# Altium PCB PD_Controller_Wall_Following_Robo_1.PcbDoc
Units mm, origin at the board's own origin, x right, y up, seen from the top; angles counter-clockwise.
Board outline 59.69 x 64.13 mm, 2 copper layers (Top Layer, Bottom Layer); 19 components, 16 nets, 58 pads, 4 vias.
Unrouted connection lines stored in the file: 1.
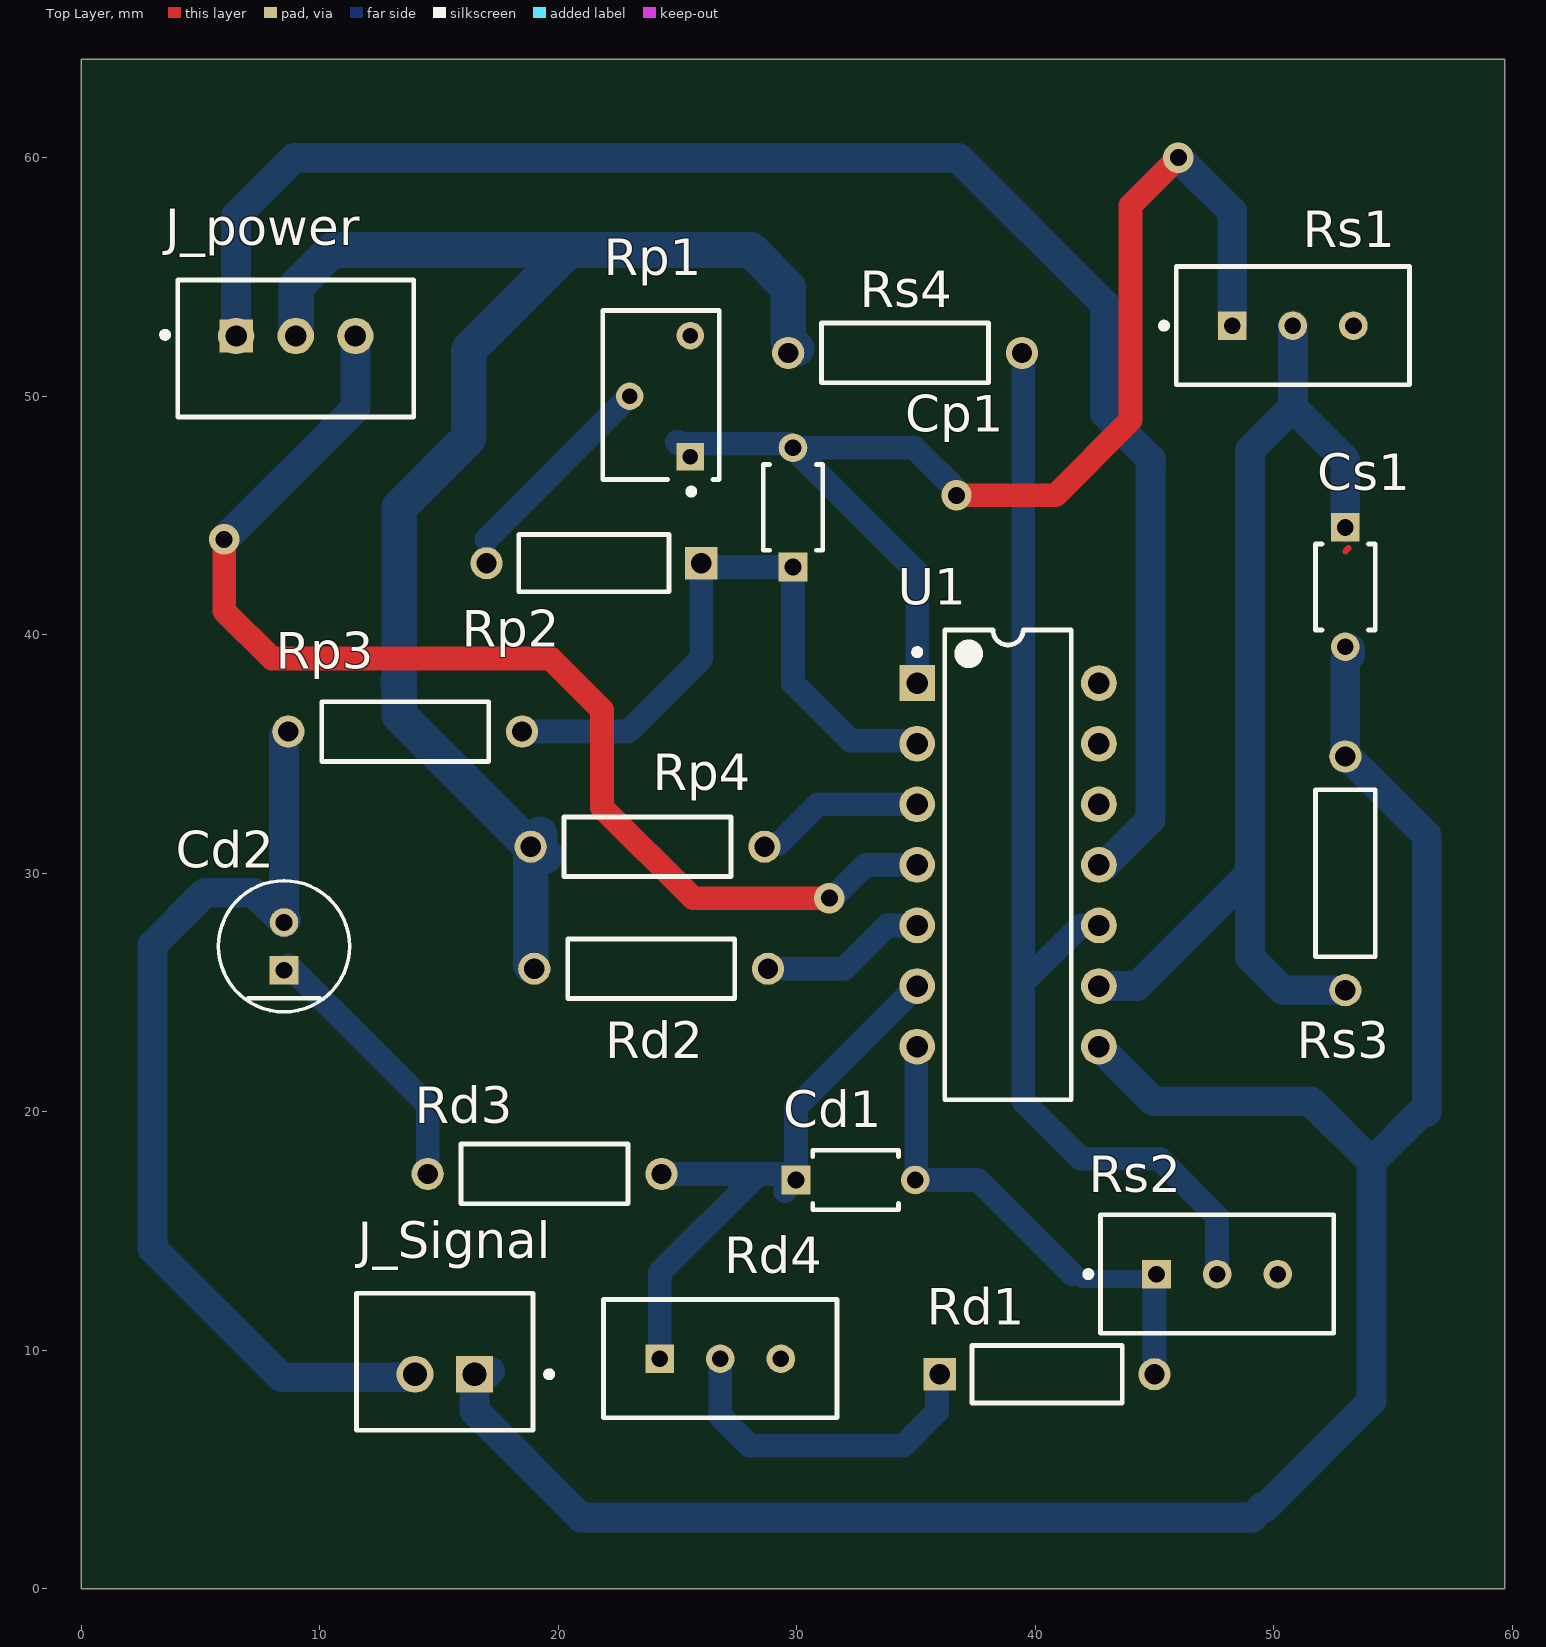
[diagram p0: Top Layer view]
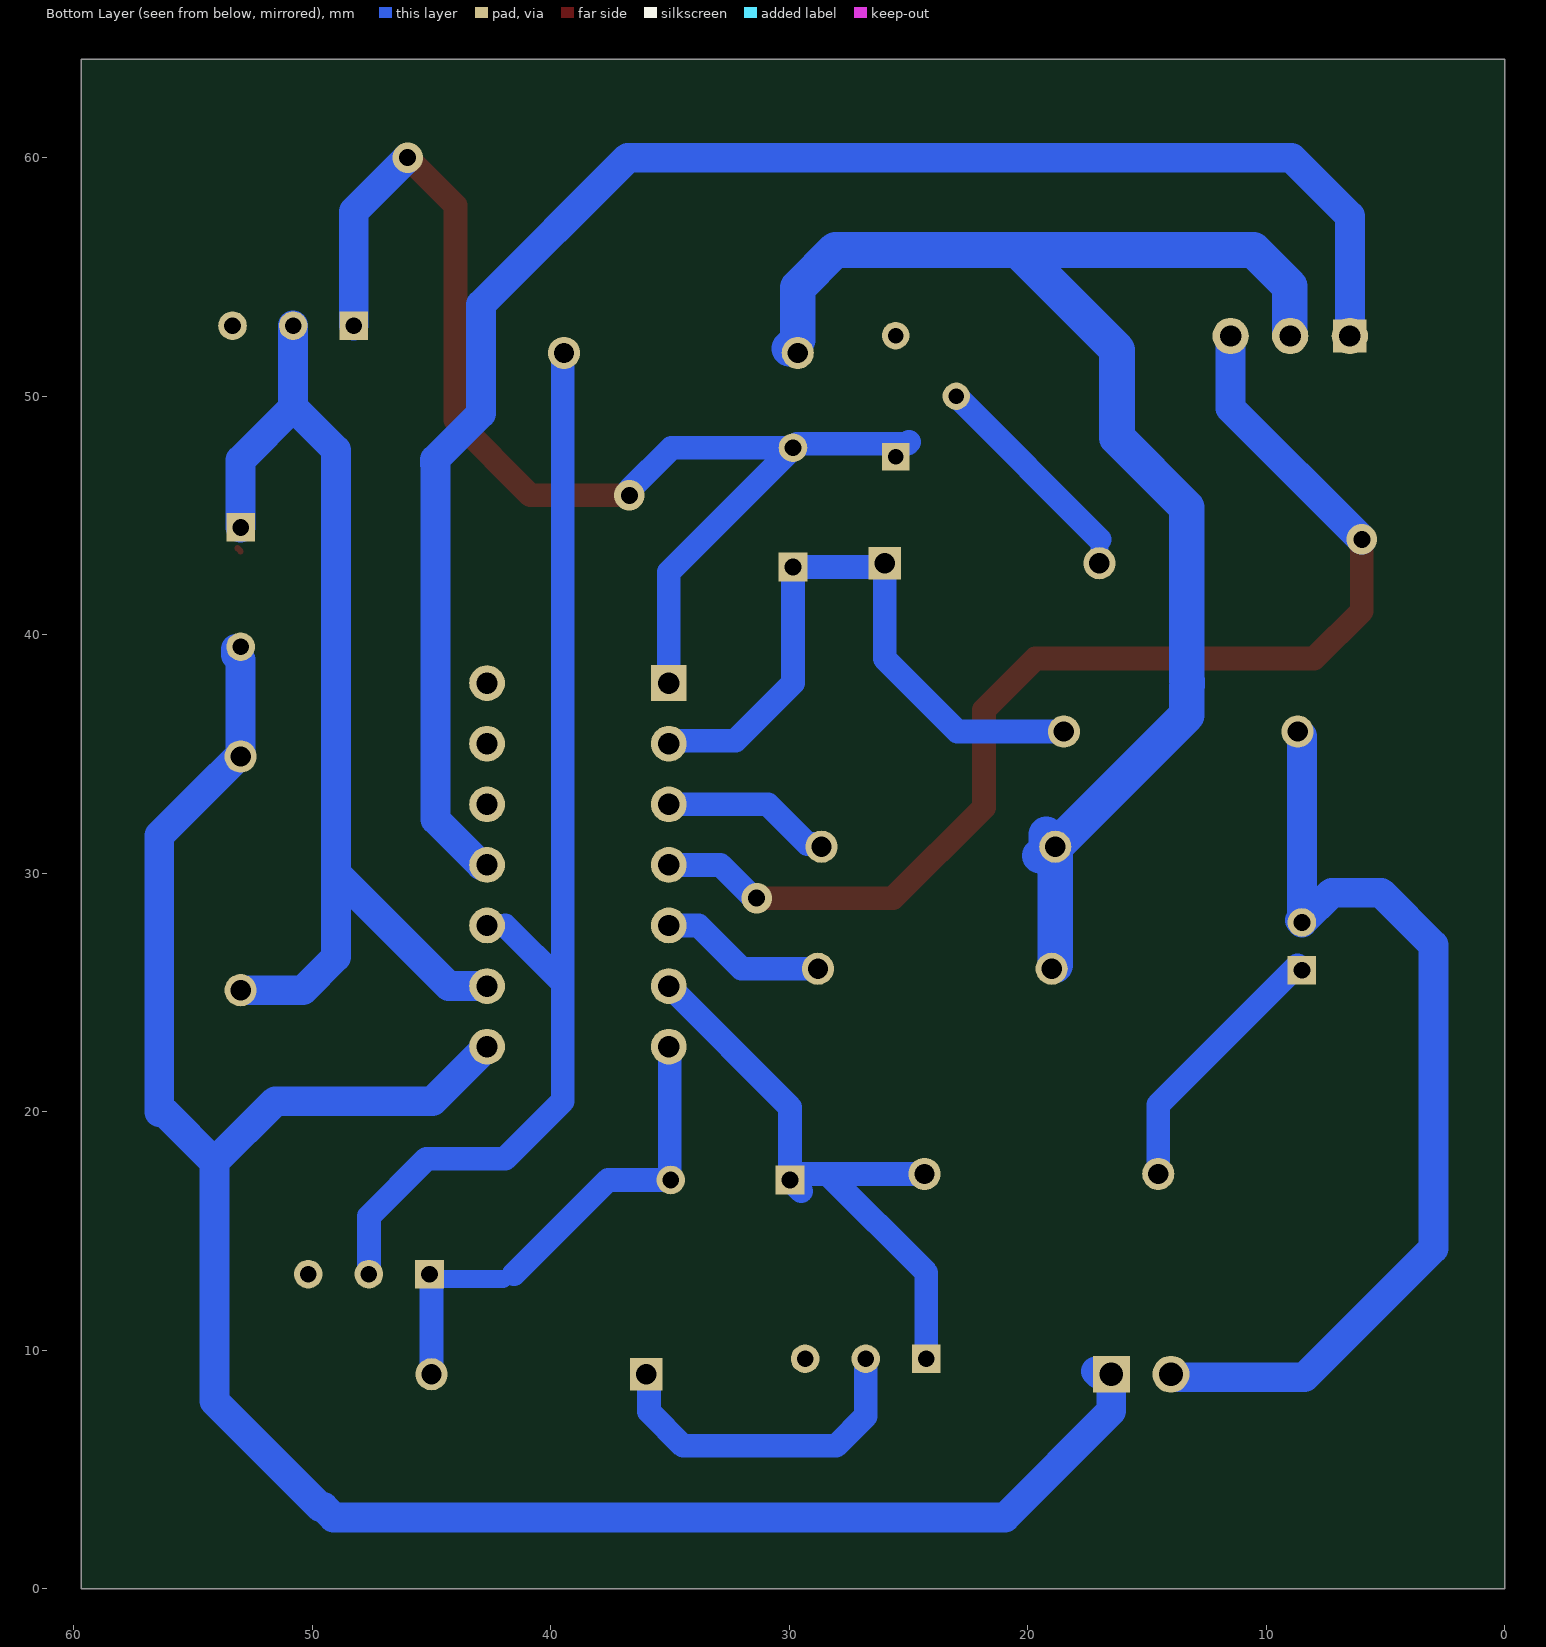
[diagram p1: Bottom Layer view, seen from below]
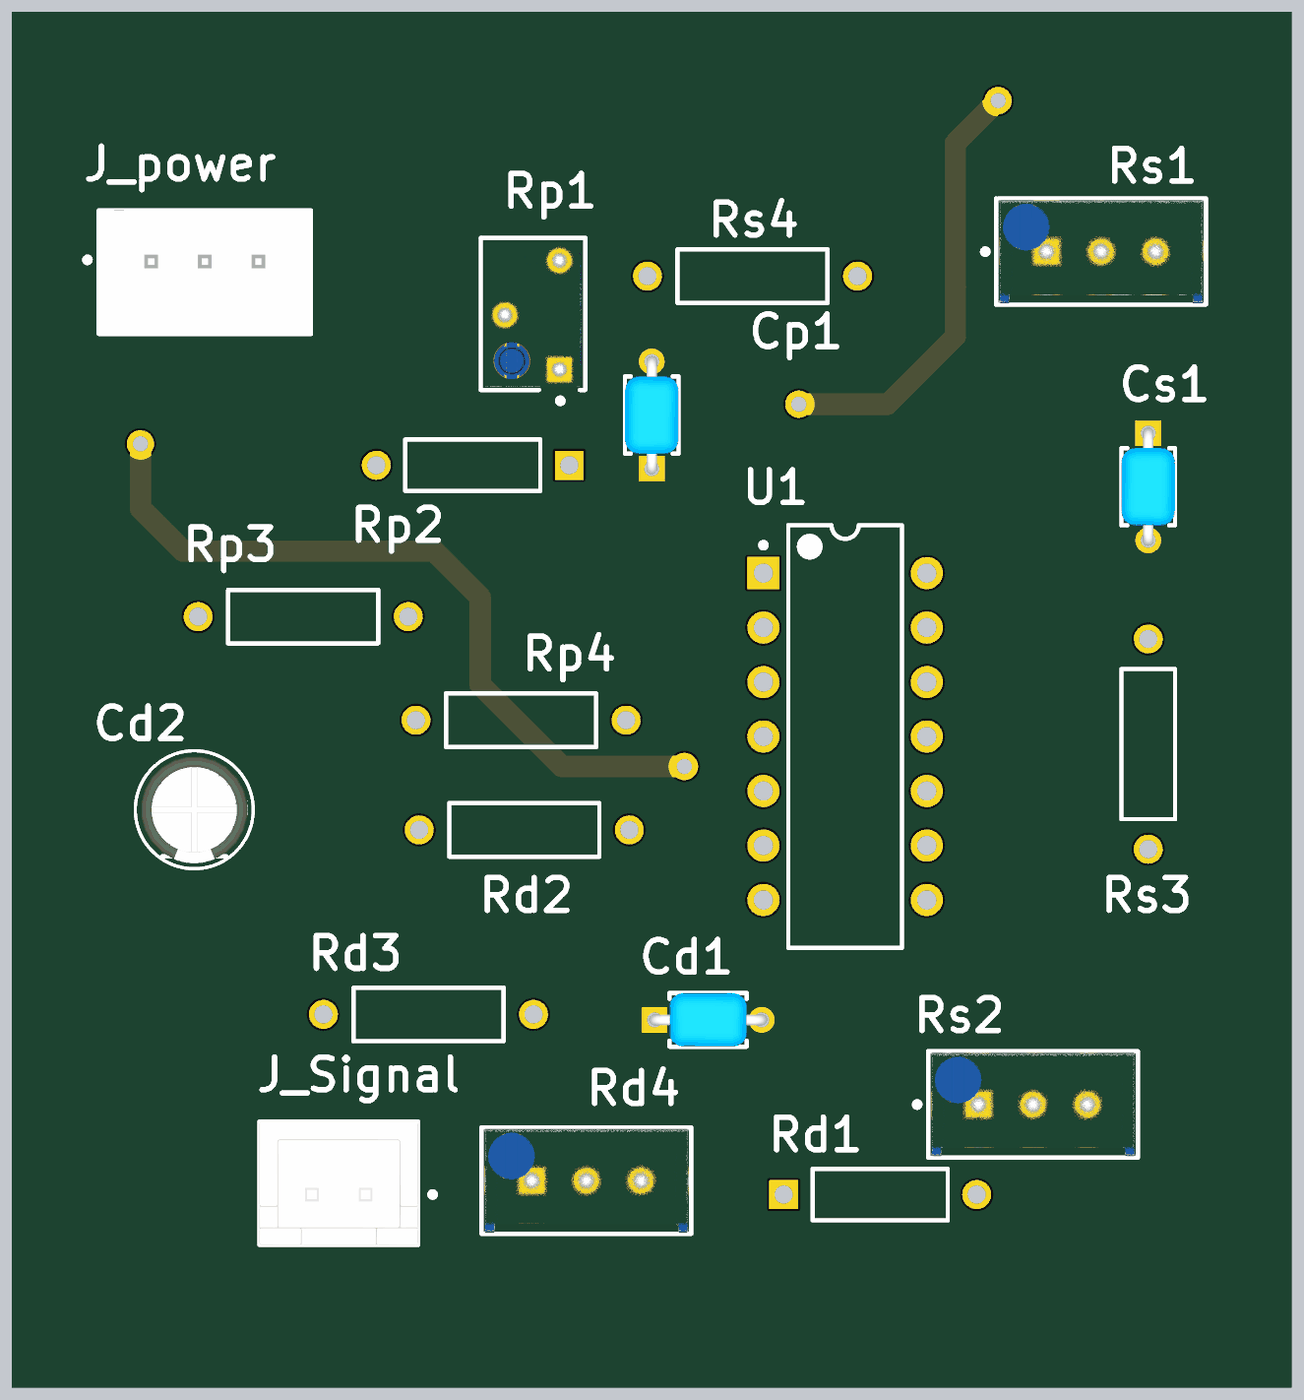
[diagram p2: 3D render of the assembled board from above, using the file's embedded part models]

## Layer stack, top to bottom
Top Solder: solder mask 0.0102, Solder Resist, Dk 3.5
Top Layer: signal copper 0.0356
Dielectric 1: dielectric 0.32, FR-4, Dk 4.8
Bottom Layer: signal copper 0.0356
Bottom Solder: solder mask 0.0102, Solder Resist, Dk 3.5

## Board outline
0,0 59.69,0 59.69,64.135 0,64.135

## Design rules (kind name [scope] priority, off if disabled: settings)
Clearance [All] p1: gap=0.254 ignorepadtopadclearanceinfootprint=FALSE except(0: Arc-Hole Track-Hole SMDPad-Hole THPad-Hole Via-Hole Fill-Hole Poly-Hole Region-Hole Text-Hole)
PolygonConnect [All] p1: connectstyle=Relief reliefconductorwidth=0.254 reliefentries=4 polygonreliefangle="90 Angle" airgapwidth=0.254
RoomDefinition Sheet1 [InComponentClass('Sheet1')] p1: confinementstyle=ConfineOut formatcopy=TRUE lockcomponents=FALSE outline 114.681,-17.526 247.777,-17.526 247.777,5.588 114.681,5.588
RoutingVias [All] p1: holewidth=0.711 width=1.27 viastyle="Through Hole" minholewidth=0.711 minwidth=1.27 maxholewidth=0.711 maxwidth=1.27
SolderMaskExpansion [All] p1: expansion=0.102 istentingtop=FALSE
Width [All] p1: maxlimit=1.5 minlimit=0.5 preferedwidth=0.75 minimp=50.000000 maximp=50.000000 favimp=50.000000
30 further rules are at their usual default settings.

## Classes and differential pairs
component class Sheet1: Cd1 Cd2 Cp1 J_power J_Signal Rd1 Rd2 Rd3 Rd4 Rp1 Rp2 Rp3 Rp4 Rs1 Rs2 Rs3 Rs4

## Components (designator, comment, footprint, x,y, rotation, side; value= is the part's Value field where it differs from the comment)
Cd1 "27pF" FP-RCE0K1-MFG 32.472,17.145 r0 top
Cd2 "2.2uF" FP-RAD-TH-D_5_0_5-L_11_1-MFG 8.509,26.94 r90 top
Cp1 "" FP-RCE0K1-MFG 29.845,45.339 r90 top
Cs1 "27pF" FP-RCE0K1-MFG 53,42 r270 top
J_power "Power" FP-B3B-XH-A_LF_SN-MFG 9,52 r0 top
J_Signal "Signal" FP-B2B-XH-A_LF_SN-MFG 15.25,9.525 r180 top
Rd1 "100" RESA60-630X240 40.5,9 r0 top
Rd2 "10K" OMTE-RES7X2.5-2 23.9,26 r0 top
Rd3 "10K" OMTE-RES7X2.5-2 19.431,17.399 r0 top
Rd4 "10K" FP-3296W-MFG 26.797,9.652 r270 top
Rp1 "10K" FP-3266W-MFG 24.31,50.055 r90 top value=10kΩ
Rp2 "100" RESA60-630X240 21.5,43 r180 top
Rp3 "10K" OMTE-RES7X2.5-2 13.589,35.941 r0 top
Rp4 "10K" OMTE-RES7X2.5-2 23.749,31.115 r0 top
Rs1 "10K" FP-3296W-MFG 50.8,52.964 r270 top
Rs2 "10K" FP-3296W-MFG 47.625,13.203 r270 top
Rs3 "10K" OMTE-RES7X2.5-2 53,30 r90 top
Rs4 "10K" OMTE-RES7X2.5-2 34.544,51.816 r0 top
U1 "LM324N" N0014A 38.862,30.353 r0 top

## Footprints (in the part's own frame and the unit in brackets; to place one, negate y for a bottom-side part, rotate by r counter-clockwise, add the part's x,y. Pads: shape width x height; smd on the part's side, far side on the other; paste and mask are expansions set on the pad)
FP-3266W-MFG [mm]
  rect 1.15x1.15 hole 0.65 paste-1000 mask+0: 1(-2.595,-1.23)
  round 1.15 hole 0.65 paste-1000 mask+0: 2(-0.055,1.31) 3(2.485,-1.23)
  silkscreen extent -4.17,-2.44 3.54,2.44, body extent -3.64,-2.54 3.64,2.54, height 0.25
FP-3296W-MFG [mm]
  rect 1.2x1.2 hole 0.7 paste-1000 mask+0: 1(0.005,-2.54)
  round 1.2 hole 0.7 paste-1000 mask+0: 2(0.005,0) 3(0.005,2.54)
  silkscreen extent -2.48,-4.89 2.48,4.89, body extent -2.58,-4.99 2.58,4.99, height 0.25
FP-B2B-XH-A_LF_SN-MFG [mm]
  rect 1.55x1.55 hole 1 paste-1000 mask+0: 1(-1.25,0.525)
  round 1.55 hole 1 paste-1000 mask+0: 2(1.25,0.525)
  silkscreen extent -4.5,-2.88 3.7,2.88, body extent -3.8,-2.98 3.8,2.98, height 0.25
FP-B3B-XH-A_LF_SN-MFG [mm]
  rect 1.4x1.4 hole 0.9 paste-1000 mask+0: 1(-2.5,0.525)
  round 1.4 hole 0.9 paste-1000 mask+0: 2(0,0.525) 3(2.5,0.525)
  silkscreen extent -5.6,-2.88 4.95,2.88, body extent -5.05,-2.98 5.05,2.98, height 0.25
FP-RAD-TH-D_5_0_5-L_11_1-MFG [mm]
  rect 1.2x1.2 hole 0.7 paste-1000 mask+0: 1(-1,0)
  round 1.2 hole 0.7 paste-1000 mask+0: 2(1,0)
  silkscreen extent -2.75,-2.75 2.75,2.75, body extent -2.85,-2.85 2.85,2.85, height 0.25
FP-RCE0K1-MFG [mm]
  rect 1.2x1.2 hole 0.7 paste-1000 mask+0: 1(-2.5,0)
  round 1.2 hole 0.7 paste-1000 mask+0: 2(2.5,0)
  silkscreen extent -1.8,-1.25 1.8,1.25, body extent -3.2,-1.35 3.2,1.35, height 0.25
N0014A [mm] "DIP, 14-Leads, Body 19.7x6.6mm, Pitch 2.54mm"
  rect 1.5x1.5 hole 0.9: 1(-3.81,7.62)
  round 1.5 hole 0.9: 2(-3.81,5.08) 3(-3.81,2.54) 4(-3.81,0) 5(-3.81,-2.54) 6(-3.81,-5.08) 7(-3.81,-7.62) 8(3.81,-7.62) 9(3.81,-5.08) 10(3.81,-2.54) 11(3.81,0) 12(3.81,2.54) 13(3.81,5.08) 14(3.81,7.62)
  silkscreen extent -3.93,-9.85 2.65,9.85, body extent -3.95,-9.85 3.95,9.85, height 5.08
OMTE-RES7X2.5-2 [mm] "Resistor, Axial; Body 7x2.5mm, Lead Dia. 0.6mm"
  round 1.35 hole 0.85: 1(-4.9,0) 2(4.9,0)
  silkscreen extent -3.5,-1.25 3.5,1.25, body extent -3.5,-1.25 3.5,1.25, height 2.5
RESA60-630X240 [mm] "Axial Resistor, 2-Leads, Dia 2.4mm, Body Length 6.3mm"
  rect 1.35x1.35 hole 0.85: 1(-4.5,0)
  round 1.35 hole 0.85: 2(4.5,0)
  silkscreen extent -3.15,-1.2 3.15,1.2, body extent -3.15,-1.2 3.15,1.2, height 2.4

## Part data
Cd1 Cs1: library part CMP-06035-026251-1, "Cap Ceramic 27pF 50V C0G ±5% Radial 5mm +125°C Automotive Bulk", Case/Package=Radial, Dielectric=C0G, Max Operating Temperature=125°C, Min Operating Temperature=-55°C, Package Quantity=1, Ratings=AEC-Q200, Resistor Type=Ceramic, Tolerance=5%, Voltage Rating=50V, Capacitance=27pF, Height=3.5mm, Height - Seated (Max)=0.138inch, Lead Diameter=0.5mm, Lead Pitch=0.197inch, Lead/Base Style="Formed Leads", Length=0.142inch, Mount="Through Hole", Packaging="Tape and Reel", Termination=Radial, Voltage Rating (DC)=50V, Width=0.098inch
Cd2: library part CMP-05427-000832-1, "Aluminum Electrolytic Capacitors (Radial Lead Type) AEC-Q200 Qualified 2.2uF ±20% 50V", Case/Package=Radial, Max Operating Temperature=105°C, Min Operating Temperature=-55°C, Package Quantity=2000, Ripple Current=18mA, Tolerance=20%, Voltage Rating=50V, Capacitance=2.2uF, Diameter=5mm, Height=11mm, Height - Seated (Max)=0.472inch, Lead Diameter=0.5mm, Lead Pitch=5mm, Lead/Base Style=Straight, Length=11mm, Life (Hours)=1000Hour, Mount="Through Hole", Packaging="Tape and Reel", Radiation Hardening=No, RoHS Compliant=Yes, Series=NHG, Termination=Radial, Voltage Rating (DC)=50V
Cp1: library part CMP-06035-026251-1, "Cap Ceramic 27pF 50V C0G ±5% Radial 5mm +125°C Automotive Bulk", Capacitance=27pF, Case/Package=Radial, Dielectric=C0G, Max Operating Temperature=125°C, Min Operating Temperature=-55°C, Package Quantity=1, Ratings=AEC-Q200, Resistor Type=Ceramic, Tolerance=5%, Voltage Rating=50V, Height=3.5mm, Height - Seated (Max)=0.138inch, Lead Diameter=0.5mm, Lead Pitch=0.197inch, Lead/Base Style="Formed Leads", Length=0.142inch, Mount="Through Hole", Packaging="Tape and Reel", Termination=Radial, Voltage Rating (DC)=50V, Width=0.098inch
J_power: library part CMP-17439-000014-3, "CONN HEADER VERT 3POS 2.5MM", Color=Natural, Contact Resistance=20mR, Current Rating=3A, Flammability Rating="UL94 V-0", Housing Color=White, Insulation Resistance=1GR, Max Operating Temperature=85°C, Max Voltage Rating (AC)=250V, Min Operating Temperature=-25°C, Connector Type=Header, Contact Finish - Mating=TIN, Contact Material=Brass, Contact Plating=Tin, Contact Shape=Square, Contact Type="Male Pin", Depth=5.75mm, Fastening Type=Detent, Gender=Male, Housing Material=Polyamide, Insulation Color=Natural, Insulation Material=Nylon, Lead Free="Lead Free", Lead Pitch=2.5mm, Length=9.9mm, Max Current Rating=3A, Max Voltage Rating (DC)=250V, Mount="Through Hole", Number Of Contacts=3, Number of Positions=3, Number Of Rows=1, Orientation=Straight, Packaging=Bulk, Pitch=2.5mm, REACH SVHC="No SVHC", Series=XH, Termination=Solder, Voltage Rating=250V, Voltage Rating (AC)=250V, Wire/Cable Gauge=22AWG
J_Signal: library part CMP-2000-05888-3, "CONN HEADER VERT 2POS 2.5MM", Color=Natural, Contact Resistance=20mR, Current Rating=3A, Housing Color=White, Insulation Resistance=1GR, Max Operating Temperature=85°C, Max Voltage Rating (AC)=250V, Min Operating Temperature=-25°C, Connector Type="Male Pin", Contact Material=Brass, Contact Plating=Tin, Contact Type="Male Pin", Depth=5.75mm, Fastening Type=Detent, Housing Material=Polyamide, Lead Free="Lead Free", Lead Pitch=2.5mm, Length=7.4mm, Max Current Rating=3A, Max Voltage Rating (DC)=250V, Mount="Through Hole", Number Of Contacts=2, Number of Positions=2, Number Of Rows=1, Orientation=Straight, Packaging=Bulk, Pitch=2.5mm, REACH SVHC="No SVHC", Series=XH, Termination=Solder, Voltage Rating=250V, Voltage Rating (AC)=250V, Wire/Cable Gauge=22AWG
Rd1 Rp2: library part CMP-1659-00071-1, "Axial Resistor, 100 Ohm, +/- 1%, 0.25 W, -55 to 155 degC, 2-Pin THD, RoHS, Bulk", Case\Package=Axial, Max Operating Temperature="155 degC", Min Operating Temperature="-55 degC", Package Quantity=200, Power Rating="250 mW", Resistance="4.75 kohm", Tolerance=1%, Type (Resistor)="Metal Film", Voltage Rating="250 V", ComponentLink1Description="Manufacturer URL", ComponentLink1URL=http://www.yageo.com/, ComponentLink2Description=Datasheet, ComponentLink2URL=http://www.yageo.com/documents/recent/Yageo%20LR_MFR_2013.pdf, DatasheetVersion=Apr-13, Length="0.248 inch", Mount="Through Hole", PackageDescription="2-Pin Axial Lead, Dia 2.4 mm, Body Length 6.3 mm", PackageReference=MFR-25, Packaging=Bulk, RoHSCompliant=true
Rd2 Rd3 Rp3 Rp4 Rs3 Rs4: library part CMP-2000-06865-1, "Little Demon(R) Carbon Composition Molded OD Series, 250 V, 10 KOhm, +/-5%, -70 to 130 degC, 2-Pin THD, RoHS, Bulk", Manufacturer=Ohmite, Operating Temperature=-, Package / Case=Axial, Package Description="2-Pin THD Resistor, Body 7 x 2.5 mm, Lead Dia. 0.6 mm", Package Reference=RES7X2.5, PartNumber=OD103JE, Power (Watts)=0.25W,1/4W, Power Rating=0.25W, Resistance (Ohms)=10k, Standard Package=100, Tolerance=±5%, Catalog Drawings=OD,OF,OASeries, Category=Resistors, Composition=CarbonComposition, Datasheet URL=http://www.ohmite.com/cat/res_od_of_oa.pdf, Datasheet Version=06/2016, EDA / CAD Models=DownloadfromAcceleratedDesigns, Family=ThroughHoleResistors, Features=PulseWithstanding, Height=-, Manufacturer URL=http://www.ohmite.com/, Mounting Technology=ThroughHole, Number of Terminations=2, Online Catalog=OD,OF,OASeries,LittleDemon®, Packaging=Bulk, RoHS Information="LittleDemon\"E\"SeriesMaterialDeclaration", Series=LittleDemon®OD, Size / Dimension="0.098\"Diax0.276\"L(2.50mmx7.00mm)", Supplier Device Package=Axial, Temperature Coefficient=-
Rd4: library part CMP-07234-000043-1, "TRIMMER 50K OHM 0.5W PC PIN TOP", Color=Blue, Insulation Resistance=1GR, Manufacturer Series=3296, Max Operating Temperature=125°C, Max Power Dissipation=500mW, Min Operating Temperature=-55°C, Package Quantity=50, Resistance=50kR, Resistance Law=Linear, Resistance Tolerance=10%, Resistor Type=Cermet, Temperature Coefficient=100ppm/°C, Actuator Orientation=Vertical, Actuator Type=SCREW, Contact Plating=Tin, Depth=4.83mm, Height=0.395inch, Lead Free="Lead Free", Length=9.53mm, Military Standard=Not, Mount=Panel, Number of Pins=3, Number of Terminals/Pins=3, Number of Turns=25, Packaging=Rail/Tube, Power Rating=500mW, Radiation Hardening=No, REACH SVHC="No SVHC", RoHS Compliant=Yes, Series=3296, Taper=Linear, Technology=CERMET, Terminal Finish=Tin, Termination=Pin, Tolerance=10%, Type=Potentiometer, Weight=0.03oz, Width=9.53mm
Rp1: library part CMP-07234-000016-1, "TRIMMER 10K OHM 0.25W PC PIN TOP", Manufacturer=Bourns, Manufacturer Part Number=3266W-1-103LF, Package=3266W, Power Rating=0.25W, Resistance=10kΩ, Temperature="-55°C to +125°C", Temperature Coefficient=100ppm/°C, Temperature Range High=+125°C, Temperature Range Low=-55°C, Tolerance=10%, Automotive=No, Category=Res, ComponentLink2Description=Datasheet, ComponentLink2URL=https://www.bourns.com/docs/Product-Datasheets/3266.pdf, Composition=Cermet, Device Class L1="Passive Components", Device Class L2=Resistors, Device Class L3="Variable Resistors and Potentiometers", Digikey Description="TRIMMER 10K OHM 0.25W PC PIN TOP", Height=9.02mm, Lead Free=Yes, Mouser Description="Trimmer Resistors - Through Hole 1/4 10Kohms 10% SQ W/Standoff Sealed", Octopart=https://octopart.com/3266w-1-103lf-bourns-81445, RoHS=TRUE, Series=3266, Standoff Height=0.43mm
Rs1 Rs2: library part CMP-1747-00001-5, "TRIMMER 10K OHM 0.5W PC PIN TOP", Color=Blue, Insulation Resistance=1GR, Max Operating Temperature=125°C, Max Power Dissipation=500mW, Min Operating Temperature=-55°C, Package Quantity=50, Resistance=10kR, Resistance Tolerance=10%, Resistor Type=Cermet, Temperature Coefficient=100ppm/°C, Contact Plating=Tin, Depth=4.83mm, Height=11.55mm, Lead Free="Lead Free", Length=9.53mm, Military Standard=Not, Mount="Through Hole", Number of Turns=25, Packaging=Rail/Tube, Power Rating=500mW, Radiation Hardening=No, Reach SVHC Compliant=Yes, RoHS Compliant=Yes, Series=3296, Taper=Linear, Technology=CERMET, Termination=Pin, Tolerance=10%, Weight=0.03oz, Width=9.53mm
U1: library part CMP-0055-00082-3, "Low Power Quad Operational Amplifier, 14-pin MDIP", Manufacturer="Texas Instruments", Package Reference=N0014A, PackageTopMarking=NSUZXYYTTE#*LM324N, PowerWise=N, Code_JEDEC=MS-001-AA, ComponentLink1Description="Datasheet URL", ComponentLink1URL=http://www.ti.com/general/docs/lit/getliterature.tsp?genericPartNumber=LM324&fileType=pdf, CompType=Amplifiers, PackageDescription="MDIP, .750 x .250 x.130in, 14 Lead, .100in Pitch", PinCount=14, RoHS=N

## Free pads (board coordinates)
  round 1.524 hole 0.762: 1(11.5,52.525) 3(6.5,52.525) 4(9,52.525)

## Via types
v1: diameter 1.27, hole 0.711, Top Layer to Bottom Layer, 4 vias

## Nets (pads, with @x,y where several pads share a name; then routed paths per layer and width w, separated by ;. In a path a pad name is that pad's centre, name@x,y a point inside that pad or via, vN(x,y) a via of type N, cw(c..) or ccw(c..) an arc to the next point about the centre after c; other vN are vias at no path point)
GND: J_power.1 pad.3 U1.11 | length 70.4
  Bottom Layer w1.25: pad.3 6.5,57.554 8.946,60 36.774,60 42.926,53.848 42.926,49.276 44.853,47.349 44.853,47.139 44.831,47.117 44.831,32.258 42.926,30.353 U1.11
MID: J_power.2 pad.4 Rd2.1 Rp4.1 Rs4.1 | length 62.7
  Top Layer w0.254: Rd2.1@18.873,26.127 Rd2.1 ; Rp4.1@18.976,31.369 Rp4.1@19.103,31.242
  Bottom Layer w1.5: pad.4@9.017,52.705 9.017,54.61 10.541,56.134 20.447,56.134 ; Rd2.1@18.849,26.162 Rp4.1@18.849,30.734 ; Rp4.1 13.335,36.629 13.335,37.846 13.313,37.868 13.313,38.078 13.335,38.1 13.335,45.335 16.256,48.256 16.256,51.943 20.447,56.134 ; Rp4.1@19.166,31.051 19.484,30.734 ; Rp4.1@19.23,31.115 Rp4.1@19.23,31.623 ; Rs4.1@30,52 29.644,52.356 29.644,54.557 28.067,56.134 20.447,56.134
NetCd1_1: Cd1.1 Rd3.2 Rd4.1 U1.6 | length 26.1
  Bottom Layer w1: Rd4.1 24.257,13.257 28.399,17.399 ; Rd3.2 27.399,17.399 27.5,17.399 28.399,17.399 ; Cd1.1@29.499,16.672 Cd1.1 ; U1.6 29.972,20.193 Cd1.1 ; 28.399,17.399 29.718,17.399 Cd1.1
NetCd1_2: Cd1.2 Rd1.2 Rs2.1 U1.7 | length 21.1
  Bottom Layer w0.254: Cd1.2 Cd1.2@35.012,17.185 ; U1.7@35.012,22.693 U1.7 ; Rs2.1@45.082,13.2 Rs2.1@45.085,13.203
  Bottom Layer w0.75: 42,13 44.887,13 45,13.113 Rs2.1
  Bottom Layer w1: Cd1.2 37.592,17.145 41.539,13.198 ; Cd1.2@35.012,17.185 U1.7@35.012,22.693 ; Rd1.2 Rs2.1@45,13.113
NetCd2_1: Cd2.1 Rd3.1 | length 11.1
  Bottom Layer w1: Cd2.1@8.7,26.13 14.531,20.299 Rd3.1
NetCp1_1: Cp1.1 Rp2.1 Rp3.2 U1.2 | length 27.7
  Bottom Layer w1: Rp3.2 22.941,35.941 26,39 Rp2.1@26,42.545 ; Rp2.1@26,42.672 Rp2.1 26.161,42.839 Cp1.1 29.845,37.973 32.258,35.56 34.925,35.56 U1.2
NetCp1_2: Cp1.2 Rp1.1 Rs1.1 U1.1 | length 53.2
  Top Layer w1: v1(36.703,45.847) 40.847,45.847 44,49 44,58 v1(46,60)
  Bottom Layer w1: 24.979,48.078 25.051,48.006 29.678,48.006 Cp1.2 ; U1.1 35.052,42.632 Cp1.2 ; v1(36.703,45.847) 36.703,46.08 34.944,47.839 Cp1.2
  Bottom Layer w1.25: v1(46,60) 48.26,57.74 Rs1.1
NetCs1_1: Cs1.1 Rs1.2 Rs3.1 U1.9 | length 46.2
  Top Layer w0.254: 53,43.5 53.127,43.627
  Bottom Layer w1.25: U1.9 44.273,25.273 49,30 ; Rs1.2 50.8,49.53 ; Rs3.1 50.391,25.1 49,26.491 49,27 49,30 ; Cs1.1 53,47.33 50.8,49.53 ; 49,30 49,47.743 50.787,49.53 50.8,49.53
NetRd1_1: Rd1.1 Rd4.2 | length 13.8
  Bottom Layer w1: Rd4.2 26.797,7.239 28.036,6 34.448,6 35.886,7.438 Rd1.1@35.886,8.636
NetRd2_2: Rd2.2 U1.5 | length 7
  Bottom Layer w1: Rd2.2 32,26 33.813,27.813 U1.5
NetRp1_2: Rp1.2 Rp2.2 | length 9.5
  Bottom Layer w0.75: Rp2.2 17,44
  Bottom Layer w1: 17,44 Rp1.2
NetRp4_2: Rp4.2 U1.3 | length 7.1
  Bottom Layer w1: Rp4.2 28.764,31.23 29.23,31.23 30.893,32.893 U1.3
NetRs2_2: Rs2.2 Rs4.2 U1.10 | length 47.5
  Bottom Layer w0.254: U1.10@42.672,27.686 U1.10
  Bottom Layer w1: Rs4.2@39.444,51.815 39.497,51.762 39.497,25.4 ; 41.91,27.813 39.497,25.4 ; Rs2.2@47.625,13.203 47.625,15.621 45.212,18.034 41.91,18.034 39.497,20.447 39.497,25.4
Signal_In: Cd2.2 J_Signal.2 Rp3.1 | length 41.2
  Top Layer w0.254: Cd2.2 Cd2.2@8.509,28.196
  Bottom Layer w1.25: Cd2.2 7.262,29.187 5.187,29.187 3,27 3,14.272 8.399,8.873 J_Signal.2@14,8.873 ; Cd2.2@8.599,28.03 8.509,28.12 8.509,35.761 Rp3.1
Signal_Out: Cs1.2 J_Signal.1 Rs3.2 U1.8 | length 91.3
  Bottom Layer w1.25: J_Signal.1@17.137,9.127 17.01,9 J_Signal.1 16.5,7.459 20.959,3 49.101,3 49.53,3.429 49.657,3.429 54.102,7.874 54.102,17.898 ; U1.8 44.958,20.447 51.553,20.447 54.102,17.898 ; Cs1.2@53.2,39.409 53.2,39.153 53,38.953 Rs3.2 53.095,34.9 54.578,33.417 54.583,33.417 56.414,31.586 56.414,20 56.204,20 54.102,17.898
VCC: J_power.3 pad.1 U1.4 | length 50.5
  Top Layer w1: v1(6,44) 6,41 8,39 19.688,39 21.844,36.844 21.844,32.766 25.654,28.956 v1(31.369,28.956)
  Bottom Layer w1: v1@31.623,29.083 32.893,30.353 U1.4
  Bottom Layer w1.25: v1(6,44) 11.5,49.5 pad.1
pads on no net: Rd4.3 Rp1.3 Rs1.3 Rs2.3 U1.12 U1.13 U1.14